# Altium PCB Optosense.PcbDoc
Units mil, origin at the board's own origin, x right, y up, seen from the top; angles counter-clockwise.
Board outline 2152.52 x 511.81 mil, 2 copper layers (Top Layer, Bottom Layer), stack 22.485 mil thick; 51 components, 30 nets, 127 pads, 19 vias.
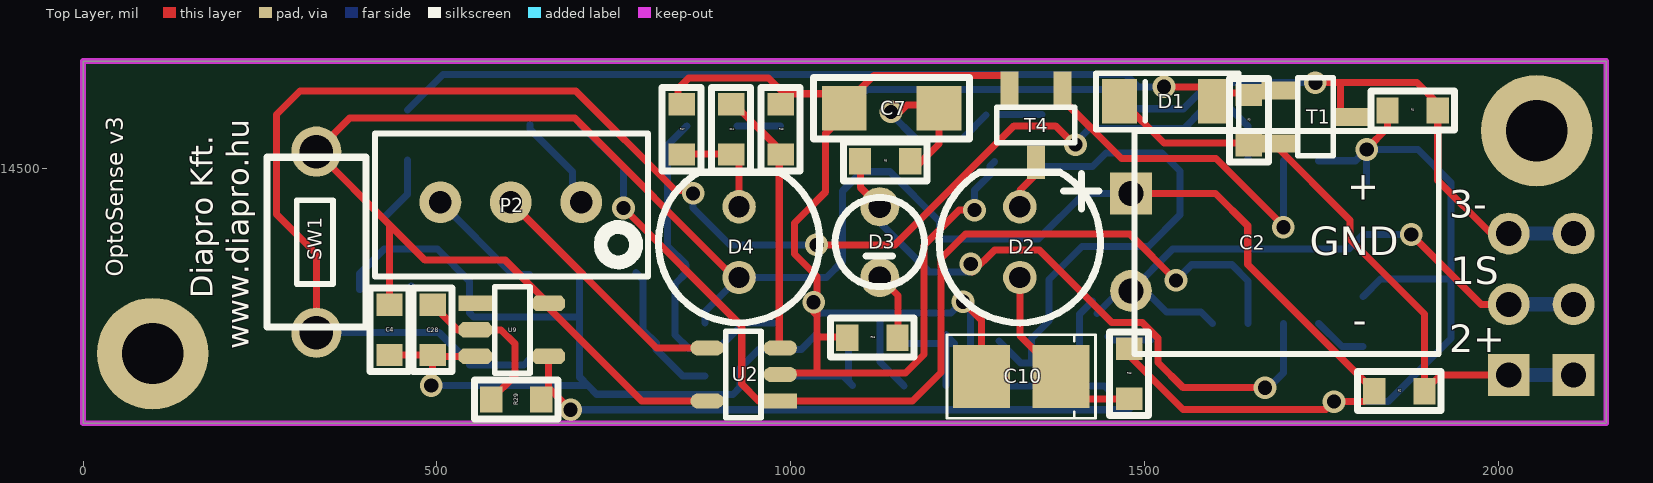
[diagram p0: Top Layer view]
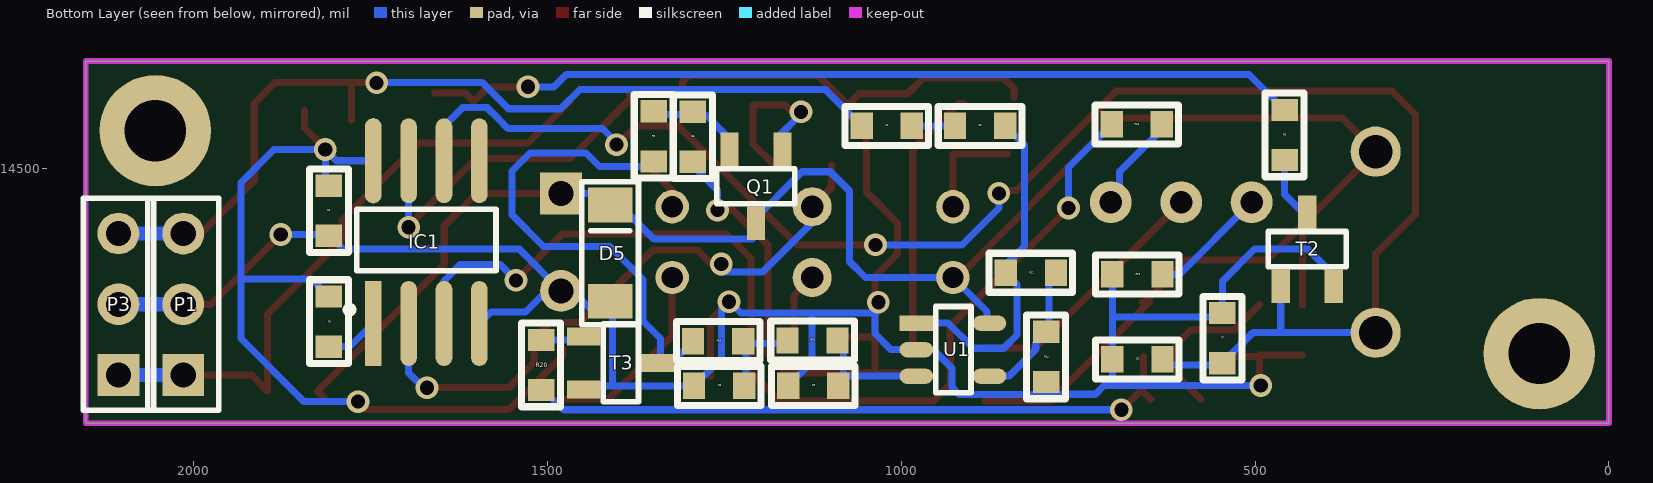
[diagram p1: Bottom Layer view, seen from below]
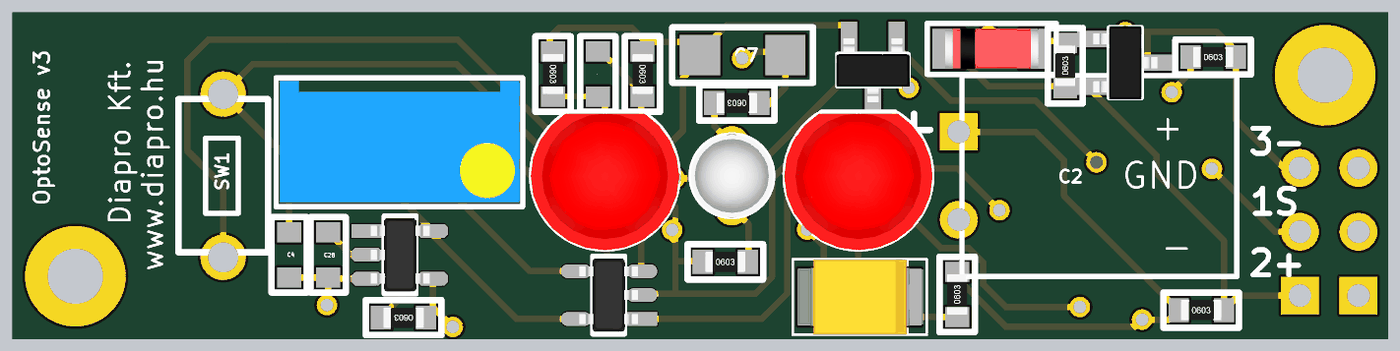
[diagram p2: 3D render of the assembled board from above, using the file's embedded part models]
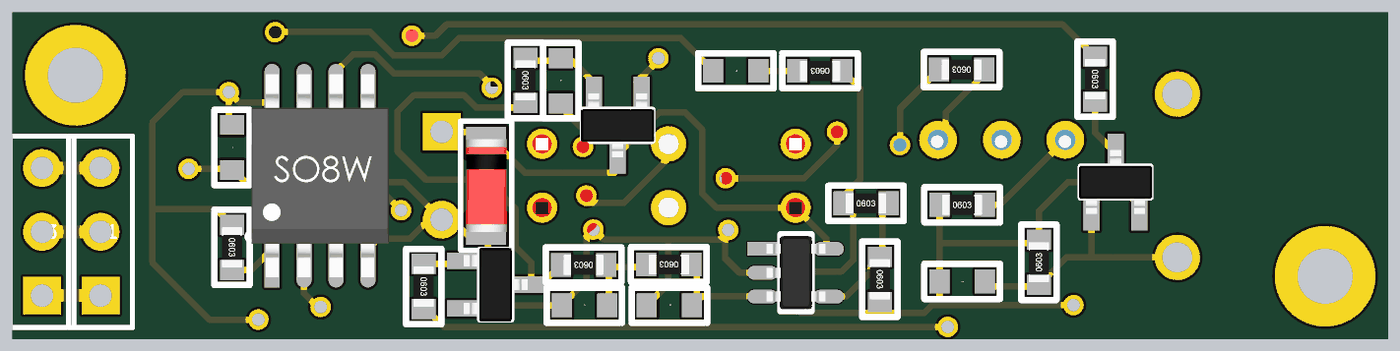
[diagram p3: 3D render of the assembled board from below, using the file's embedded part models]

## Layer stack, top to bottom
Top Layer: signal copper 1.4
Dielectric: core 19.685, FR-4, Dk 4.8
Bottom Layer: signal copper 1.4

## Board outline
0,14139.68 0,14651.5 2152.52,14651.5 2152.52,14139.68

## Design rules (kind name [scope] priority, off if disabled: settings)
Clearance [All] p1: gap=10
PolygonConnect [All] p1: connectstyle=Relief reliefconductorwidth=10 reliefentries=4 polygonreliefangle="90 Angle"
RoutingVias [All] p1: holewidth=28 width=50 viastyle="Through Hole" minholewidth=20 minwidth=32 maxholewidth=20 maxwidth=32
SilkToSilkClearance [All] p1: silktosilkclearance=0
SilkscreenOverComponentPads [All] p1: minsilkscreentomaskgap=0
SolderMaskExpansion [All] p1: expansion=4
Width [All] p1: maxlimit=10 minlimit=10 preferedwidth=10
26 further rules are at their usual default settings.

## Components (designator, comment, footprint, x,y, rotation, side; value= is the part's Value field where it differs from the comment)
C1 "150pF" FP_0603_CAP_080 1020.63,14559.96 r0 bottom
C2 "1000uF" CAP_8x11_fekvo 1480.87,14395.59 r0 top
C3 "100nF" FP_0603_CAP_080 1809.02,14439.85 r90 bottom
C4 "100nF" FP_0603_CAP_080 433.07,14271.65 r270 top
C5 "100nF" FP_0603_CAP_080 666.38,14230 r180 bottom
C6 "100nF" FP_0603_CAP_080 1294.46,14544.59 r90 bottom
C7 "22uF" FP_1206_CAP_125 1142.68,14584.71 r0 top
C8 "150pF" FP_0603_CAP_080 1257.46,14192.59 r180 bottom
C9 "150pF" FP_0603_CAP_080 1124.46,14192.59 r180 bottom
C10 "100uF" FP_3528 1325.75,14205.63 r180 top
C11 "150pF" FP_0603_CAP_080 915.87,14555 r90 top
C28 "5.6nF" FP_0603_CAP_080 493.98,14271.65 r90 top
D1 "ZENER_8.2V" SOD-80 1532.38,14594.41 r90 top
D2 "IR ado" LED_IR_5mm 1323.78,14395.59 r90 top
D3 "LED_RED" "led_3mm_standing R" 1125.87,14395.59 r90 top
D4 "IR vevo" LED_IR_5mm 927.13,14395.59 r90 top
D5 "ZENER_3.3V" SOD-80 1411.38,14380 r180 bottom
IC1 "ATtiny13" WSON_n_SOIC8 1671.22,14395.59 r90 bottom
P1 "Header 3" HDR1X3 2014.72,14207.74 r90 bottom
P2 "POTI" RES_trimmer_helipot_mini_90 604.46,14452 r270 top
P3 "Header 3" HDR1X3 2106.3,14207.76 r90 bottom
Q1 "NPN BC847A" TR_SOT23 1205.46,14474.59 r90 bottom
R1 "10K" FP_0603_RES 1809.02,14283.39 r270 bottom
R2 "1K5" FP_0603_RES 1860.2,14184.96 r0 top
R3 "100K" FP_0603_RES 1647.38,14568 r90 top
R4 "1K5" FP_0603_RES 1878.9,14581.61 r0 top
R5 "10K" FP_0603_RES 888.74,14559.96 r0 bottom
R6 "10K" FP_0603_RES 458.38,14547 r270 bottom
R7 "10K" FP_0603_RES 546.38,14260 r90 bottom
R8 "15K" FP_0603_RES 1133.46,14509.59 r180 top
R9 "10K" FP_0603_RES 1349.87,14545 r270 bottom
R10 "100K" FP_0603_RES 1258.82,14255.83 r0 bottom
R11 "100K" FP_0603_RES 1125.46,14256.59 r0 bottom
R12 "3K" FP_0603_RES 816.89,14352.28 r180 bottom
R13 "120R" FP_0603_RES 1478.31,14209.57 r90 top
R14 "2.2K" FP_0603_RES 795.24,14233.35 r270 bottom
R15 "100K" FP_0603_RES 667.28,14561.93 r0 bottom
R16 "10K" FP_0603_RES 1115.46,14260.59 r0 top
R17 "470K" FP_0603_RES 845.87,14555 r270 top
R18 "560K" FP_0603_RES 985.87,14555 r270 top
R19 "0R" FP_0603_RES 666.38,14350 r180 bottom
R20 "10K" FP_0603_RES 1509,14222 r270 bottom
R29 "10K" FP_0603_RES 612.09,14173.23 r180 top
SW1 "SW_tactile_2pin" SW_TACT_2PIN 329.69,14395.59 r90 top
T1 "BSS84" FET_SOT23 1741.46,14572.59 r180 top
T2 "MMBF170" FET_SOT23 426.38,14385.67 r270 bottom
T3 "MMBF170" FET_SOT23 1396.38,14225 r0 bottom
T4 "SI2306" FET_SOT23 1346.42,14560.96 r90 top
U1 "MCP6001" ANALOG_SOT23-5 926.46,14243.59 r180 bottom
U2 "MCP6001" ANALOG_SOT23-5 933.03,14208.58 r180 top
U9 "74AHC1G14" GATE_SOT23-5 606.6,14271.62 r0 top

## Footprints (in the part's own frame and the unit in brackets; to place one, negate y for a bottom-side part, rotate by r counter-clockwise, add the part's x,y. Pads: shape width x height; smd on the part's side, far side on the other; paste and mask are expansions set on the pad)
ANALOG_SOT23-5 [mm] "SOT23, 5-Leads, Body 2.9x1.6mm, Pitch 0.95mm, Lead Span 2.8mm, IPC Medium Density"
  rect 1.2x0.55 smd mask+0.05: 1(-1.327,0.95)
  oval 1.2x0.55 smd mask+0.05: 2(-1.327,0) 3(-1.327,-0.95) 4(1.3,-0.95) 5(1.3,0.95)
  silkscreen extent -0.64,-1.55 0.64,1.55, body extent -1.17,-1.46 1.17,1.46, height 1
CAP_8x11_fekvo [mm]
  round 1.5 hole 0.9: N(0,-1.75)
  rect 1.5x1.5 hole 0.9: P(0,1.75)
  silkscreen extent -2.41,-4.01 11.05,3.99, body extent -0.35,-4.01 11.09,3.96, height 7.99
FET_SOT23 [mm] "SOT23-3 tok"
  rect 1.2x0.65 smd: D(-1.327,0) G(1.327,-0.95) S(1.327,0.95)
  silkscreen extent -0.64,-1.4 0.64,1.4, body extent -1.27,-1.46 1.27,1.46, height 0.97
FP_0603_CAP_080 [mm] "0.8mm magas 0603 kapacitás"
  rect 0.8x0.95 smd: 1(-0.9,0) 2(0.9,0)
  silkscreen extent -1.5,-0.7 1.5,0.7, body extent -0.8,-0.4 0.76,0.4, height 0.8
FP_0603_RES [mm] "0603 ellenállás"
  rect 0.8x0.95 smd: 1(-0.9,0) 2(0.9,0)
  silkscreen extent -1.5,-0.7 1.5,0.7, body extent -0.8,-0.4 0.8,0.4, height 0.44
FP_1206_CAP_125 [mm] "1206 kapacitás 1.25 mm"
  rect 1.6x1.6 smd: 1(-1.7,0) 2(1.7,0)
  silkscreen extent -2.8,-1.1 2.8,1.1, body extent -1.52,-0.79 1.58,0.79, height 1.25
FP_3528 [mm] "3528 TANTÁL SMD \"B\"-TOK"
  rect 2.05x2.25 smd: N(1.425,0) P(-1.425,0)
  silkscreen extent -2.67,-1.5 2.67,1.5, body extent -2.52,-1.5 2.48,1.5, height 2.11
GATE_SOT23-5 [mm] "SOT23, 5-Leads, Body 2.9x1.6mm, Pitch 0.95mm, Lead Span 2.8mm, IPC Medium Density"
  rect 1.2x0.55 smd mask+0.05: 1(-1.327,0.95)
  oct 1.2x0.55 smd mask+0.05: 2(-1.327,0) 3(-1.327,-0.95) 4(1.3,-0.95) 5(1.3,0.95)
  silkscreen extent -0.64,-1.55 0.64,1.55, body extent -1.17,-1.46 1.17,1.46, height 1
HDR1X3 [mm] "Connector; Header; 3 Position"
  rect 1.5x1.5 hole 0.9: 1(0,0)
  round 1.5 hole 0.9: 2(2.54,0) 3(5.08,0)
  silkscreen extent -1.27,-1.27 6.35,1.27
"led_3mm_standing R" [mm]
  round 1.4 hole 0.8: A(1.27,0) K(-1.27,0)
  silkscreen extent -1.6,-1.6 1.6,1.6, body extent -1.66,-1.65 1.64,1.64, height 5.51
LED_IR_5mm [mm]
  round 1.2 hole 0.762: A(-1.27,0) K(1.27,0)
  silkscreen extent -2.9,-2.89 2.51,2.89, body extent -3.02,-3.02 2.67,3.02, height 9.53
RES_trimmer_helipot_mini_90 [mm]
  round 1.5 hole 0.8: 1(0,2.527) 2(0,0) 3(0,-2.527)
  silkscreen extent -2.46,-4.88 2.67,4.93, body extent -2.33,-4.74 2.5,4.79, height 11.55
SOD-80 [mm]
  rect 1.6x1.25 smd: A(0,-1.725) K(0,1.725)
  silkscreen extent -1.02,-2.57 1.02,2.57, body extent -0.79,-1.85 0.81,1.85, height 1.61
SW_TACT_2PIN [mm]
  round 1.8 hole 1.2: 1(-3.25,0) 2(3.25,0)
  silkscreen extent -3.05,-1.78 3.05,1.78, body extent -3.75,-1.78 3.75,1.78, height 4.3
TR_SOT23 [mm] "SOT23-3 tok"
  rect 1.2x0.65 smd: B(1.327,-0.95) C(-1.327,0) E(1.327,0.95)
  silkscreen extent -0.64,-1.4 0.64,1.4, body extent -1.27,-1.46 1.27,1.46, height 0.97
WSON_n_SOIC8 [mil]
  rect 120x23.62 smd: 1(-115,75)
  oval 120x23.62 smd: 2(-115,25) 3(-115,-25) 4(-115,-75) 5(115,-75) 6(115,-25) 7(115,25)
  oval 120.42x23.62 smd: 8(115,75)
  silkscreen extent -100,-98 46,113, body extent -159,-107 159,107, height 86

## Part data
C1 C3 C4 C5 C6 C8 C9 C11: library part CAP, "Capacitor"
C2 C10: library part CAP_ELECT, "Polarized Capacitor"
C7 C28: library part Cap, "Capacitor"
D1 D5: library part ZENER, "Zener Diode"
D2 D4: library part LED_B, "Typical LED"
D3: library part LED_R, "Typical LED"
P1 P3: "Header, 3-Pin"
Q1: library part NPN
R1 R2 R3 R4 R5 R6 R7 R8 R9 R10 R11 R12 R13 R14 R15 R16 R17 R18 R19: library part RES, "Resistor"
R20 R29: library part Res3, "Resistor"
T1: library part PMOS
T2 T3 T4: library part NMOS
U9: "SCHMITT-TRIGGER INVERTER"

## Free pads (board coordinates)
  round 157.48 hole 86.61: 0(98.43,14238.11) 0(2054.09,14553.07)

## Via types
v1: diameter 32, hole 20, Top Layer to Bottom Layer, 19 vias

## Nets (pads, with @x,y where several pads share a name; then routed paths per layer and width w, separated by ;. In a path a pad name is that pad's centre, name@x,y a point inside that pad or via, vN(x,y) a via of type N, cw(c..) or ccw(c..) an arc to the next point about the centre after c; other vN are vias at no path point)
2V4: C2.P C3.2 C4.1 D4.A D5.K IC1.8 Q1.C R1.1 R2.1 R4.1 R13.2 SW1.2 U1.5 U2.5 U9.5 | length 4149.3
  Top Layer w10: C4.1 433.07,14420.16 ; U9.5@649.61,14311.02 789.45,14171.18 U2.5 ; U9.5@659.78,14311.02 U9.5 596.73,14370.08 483.15,14370.08 433.07,14420.16 ; D4.A 920.12,14345.59 694.92,14570.79 376.93,14570.79 SW1.2 433.07,14420.16 ; R13.2 1478.31,14235.16 1554.58,14158.89 1756.43,14158.89 v1(1767.74,14170.2) 1810,14170.2 R2.1 1645.87,14363.86 1645.87,14418.79 1600.16,14464.49 C2.P ; v1(1813.94,14526.5) 1813.94,14527.48 1843.46,14557.01 R4.1
  Bottom Layer w10: U1.5@878.9,14281.42 878.9,14297.36 D4.A 1050.46,14345.59 1073.46,14368.59 1073.46,14468.11 1100.35,14495 1140.28,14495 1210.51,14424.76 1210.51,14400 1349.84,14400 1414.33,14464.49 C2.P ; IC1.8 1798.03,14510.59 v1(1813.94,14526.5) ; v1(1767.74,14170.2) 1767.68,14170.13 1843.9,14170.13 1933.27,14259.5 1933.27,14343.43 ; R1.1 1833.62,14343.43 1933.27,14343.43 ; C3.2@1813.94,14477.28 v1(1813.94,14526.5) ; v1(1813.94,14526.5) 1886.27,14526.5 1933.27,14479.5 1933.27,14343.43
19KHZ: R20.2 R29.1 U9.4 | length 917.5
  Top Layer w10: R29.1 657.78,14183.49 R29.1@657.78,14189.88 ; U9.4 R29.1@657.78,14189.88 ; v1(688.98,14158.68) R29.1@657.78,14189.88
  Bottom Layer w10: v1(688.98,14158.68) 1477.34,14158.68 R20.2@1491.33,14172.67
GND: C2.N C3.1 C4.2 C5.1 C6.1 C7.1 C8.1 C9.1 C10.N C28.1 D5.A IC1.4 P1.2 P3.2 R7.2 R14.2 R16.1 R17.1 R18.1 R19.1 T2.S T3.S T4.S U1.2 U2.2 U9.3 | length 4694.5
  Top Layer w10: C4.2 C28.1 ; v1(492.13,14192.91) 493.98,14194.76 C28.1 ; U9.3 495.97,14234.22 C28.1 ; R17.1@840.87,14600 840.87,14612.48 855.98,14627.59 968.75,14627.59 991.1,14605.24 1060,14605.24 1075.75,14589.49 1117.46,14631.2 1299.85,14631.2 1309.02,14622.04 T4.S T4.S@1309.02,14612.2 ; U2.2 987.24,14210.55 1037.36,14210.55 ; v1(1032.46,14310.59) 1032.46,14297.14 1037.36,14292.24 ; C7.1@1075.75,14575.71 1049.46,14549.42 1049.46,14466.74 1005.38,14422.65 1005.38,14378.81 1037.36,14346.83 1037.36,14292.24 ; R16.1@1089.53,14261.59 1038.46,14261.59 1037.36,14262.69 ; v1(1243.56,14311.27) 1269.65,14285.18 C10.N ; v1(1259.8,14440.87) 1238.15,14440.87 1188.46,14391.18 1188.46,14236.59 1162.43,14210.55 1037.36,14210.55 ; v1(1876.93,14406.42) 1975.61,14307.74 P1.2 ; 1037.36,14210.55 1037.36,14262.69 ; 1037.36,14262.69 1037.36,14292.24
  Bottom Layer w10: T2.S@390.98,14328.76 390.98,14350.98 425.67,14385.67 500.71,14385.67 546.38,14340 R7.2 551.81,14290 701.81,14290 ; v1(492.13,14192.91) 713.46,14192.91 ; R19.1 701.81,14290 ; C9.1 1126.38,14226.11 1126.38,14295.51 ; v1(1259.8,14440.87) 1259.8,14468.93 C6.1@1286.46,14495.59 ; C6.1@1281.46,14495.59 1281.46,14502.96 C6.1@1288.27,14509.76 ; D5.A@1426.38,14312.09 1408.38,14294.09 1408.38,14193.59 1407.38,14192.59 ; D5.A@1432.81,14294.93 1464.57,14326.69 C2.N ; T3.S 1443.63,14192.59 1407.38,14192.59 ; IC1.4 1579.81,14297 1531,14297 1501.31,14326.69 C2.N ; v1@1877.52,14406.42 v1(1876.93,14406.42) 1809.02,14406.42 1788.19,14385.59 1539.76,14385.59 C2.N ; 701.81,14290 C5.1 701.81,14204.57 713.46,14192.91 ; 713.46,14192.91 725.79,14180.59 766.38,14180.59 766.61,14180.36 918.47,14180.36 928.11,14190 928.11,14217.24 954.88,14244.02 1014.88,14244.02 1037.36,14266.5 1037.36,14292.24 1040.63,14295.51 1126.38,14295.51 ; 1126.38,14295.51 1226.65,14295.51 1242.41,14311.27 v1(1243.56,14311.27) 1254.13,14300.69 1254.13,14231.35 C8.1 1407.38,14192.59
  Bottom Layer w20: P1.2@2014.74,14307.76 P3.2
IR: IC1.7 T4.G | length 503.8
  Top Layer w10: T4.G@1383.82,14612.2 1383.82,14597.56 1467.68,14513.7 1601.11,14513.7 v1@1696.22,14418.59
  Bottom Layer w10: v1@1696.22,14407.99 IC1.7
  other v1: 1696.22,14416.59
LED: D3.A IC1.2 R8.2 | length 908.8
  Top Layer w10: R8.2@1098.39,14504.84 1098.39,14473.07 D3.A ; v1(1254.46,14364.59) 1254.46,14355.65 1256.85,14353.27 1287.8,14384.21 1351.65,14384.21 1453.7,14282.17 1496.8,14282.17 1519.21,14259.75 1519.21,14225.37 1554.7,14189.89 v1(1670.3,14189.89)
  Bottom Layer w10: D3.A 1125.87,14423.23 1195.83,14353.27 1256.85,14353.27 1254.46,14355.65 v1(1254.46,14364.59) ; v1(1670.3,14189.89) 1675.16,14189.89 1696.22,14210.94 IC1.2
LINE_A: D1.K P1.1 P3.1 R2.2 R3.1 T1.S | length 896.8
  Top Layer w10: D1.K@1468.46,14594.41 1527.28,14535.59 1681.46,14535.59 1790.46,14426.59 1790.46,14399.38 1895.63,14294.21 R2.2 1918.41,14207.74 P1.1
  Bottom Layer w20: P1.1@2014.74,14207.76 P3.1
LINE_B: C1.2 P1.3 P3.3 R4.2 T1.D | length 1313.3
  Top Layer w10: v1@1736.88,14621.01 v1@1741.88,14621.01 ; v1(1741.46,14620.59) v1@1741.88,14621.01 ; T1.D@1776.71,14567.59 1776.71,14618.35 1774.05,14621.01 ; P1.3 1989.52,14407.74 1914.33,14482.93 R4.2 1914.33,14591.54 1884.86,14621.01 1774.05,14621.01 ; v1@1741.88,14621.01 1774.05,14621.01
  Bottom Layer w10: C1.2 1107.48,14611.38 1454.2,14611.38 1481.5,14584.08 1555.32,14584.08 1592.25,14621.01 1743.14,14621.01 v1@1743.14,14622.89
  Bottom Layer w20: P1.3 P3.3@2106.28,14407.74
MUTE: C5.2 IC1.6 R7.1 SW1.1 T2.G | length 2405.4
  Top Layer w10: SW1.1 329.69,14378.86 273.58,14434.96 273.58,14576 306.76,14609.17 696.34,14609.17 837.09,14468.43 862.17,14468.43 v1(862.17,14464.49) ; v1(1036.38,14391.65) 1147,14391.65 1315.35,14560 1374.4,14560 1396.85,14537.55 1404.27,14537.55 1410.77,14531.05 1410.77,14530.77 v1@1409.45,14529.45
  Bottom Layer w10: SW1.1@310.98,14248.94 SW1.1 465.78,14267.64 ; T2.G 463.78,14269.64 465.78,14267.64 ; R7.1@546.38,14222 622.94,14222 C5.2 ; R7.1 503.31,14267.64 465.78,14267.64 ; v1(862.17,14464.49) 862.17,14443.7 914.21,14391.65 v1(1036.38,14391.65) ; v1@1406.14,14539.96 1422.2,14556.02 1556.06,14556.02 1569.41,14569.37 1569.41,14569.89 1585.12,14585.59 1620,14585.59 1646.22,14559.37 IC1.6
  other v1: 1402.45,14533.45
NetC1_1: C1.1 R5.2 | length 61
  Bottom Layer w10: R5.2 C1.1
NetC6_2: C6.2 Q1.E R9.1 | length 105.5
  Bottom Layer w10: Q1.E@1245.87,14545 C6.2@1275.87,14575 ; C6.2@1292.4,14575 1293.11,14575.71 R9.1@1355.2,14575.71
NetC7_2: C7.2 Q1.B R8.1 | length 241.4
  Top Layer w10: v1@1137.8,14576.69 1141.69,14576.69 1146.61,14571.77 1164.33,14589.49 1209.61,14589.49 1209.61,14534.37 1180.08,14504.84 R8.1@1169.25,14504.84
  Bottom Layer w10: v1@1137.8,14576.69 1141.69,14576.69 Q1.B@1176.06,14542.32
  other v1: 1141.8,14579.69
NetC8_2: C8.2 R10.1 R11.2 | length 161.3
  Bottom Layer w10: R11.2 1164.9,14252.59 1231.54,14252.59 1219.45,14264.68 C8.2@1219.45,14192.83
NetC9_2: C9.2 R11.1 U1.3 | length 180.8
  Bottom Layer w10: U1.3@982.32,14206.61 1073.78,14206.61 1087.56,14192.83 1081.46,14198.93 1081.46,14248.02 R11.1
NetC10_P: C10.P D2.A R13.1 | length 273.5
  Top Layer w10: D2.A 1323.78,14263.7 C10.P 1413.35,14174.13 R13.1
NetC11_1: C11.1 D4.K R17.2 | length 151.6
  Top Layer w10: R17.2@849.96,14520 927.13,14520 D4.K
NetC11_2: C11.2 R18.2 U2.3 | length 380.8
  Top Layer w10: C11.2@911.38,14591.46 919.41,14591.46 983.8,14527.07 983.8,14247.46 U2.3
NetC28_2: C28.2 R29.2 U9.2 | length 231.7
  Top Layer w10: C28.2 529.44,14271.62 U9.2 590.58,14271.62 610.24,14251.97 610.24,14206.81 R29.2
NetD1_A: D1.A R3.2 R6.1 T1.G | length 1242.6
  Top Layer w10: v1(1527.52,14615.08) 1583.62,14615.08 1604.29,14594.41 1616.47,14606.59 R3.2@1659.46,14606.59
  Bottom Layer w10: R6.1 508.44,14632.5 1473.37,14632.5 1490.79,14615.08 v1(1527.52,14615.08)
NetD2_K: D2.K T4.D | length 63.5
  Top Layer w10: D2.K 1323.78,14468.59 1348.39,14493.2 T4.D@1348.39,14498.94
NetD3_K: D3.K R16.2 | length 87.6
  Top Layer w10: D3.K 1151.46,14319.99 R16.2@1151.46,14268.59
NetIC1_1: IC1.1 R1.2 | length 76.3
  Bottom Layer w10: IC1.1 1778.86,14247.95 R1.2
NetP2_1: P2.1 R15.1 | length 139.8
  Bottom Layer w10: R15.1 631.85,14555.13 691.89,14495.09 691.89,14464.07 P2.1
NetP2_2: P2.2 U2.4 | length 362.7
  Top Layer w10: P2.2 810.48,14245.98 U2.4
NetP2_3: P2.3 R19.2 | length 168.2
  Bottom Layer w10: P2.3 606.96,14350 R19.2
NetR6_2: R6.2 T2.D | length 90.7
  Bottom Layer w10: T2.D@428.38,14433.24 458.38,14463.24 R6.2
NetR9_2: R9.2 R10.2 T3.D | length 698.8
  Bottom Layer w10: R10.2 1325.08,14225 T3.D 1340.38,14228.76 1340.38,14259.5 1364.88,14284 1364.88,14342.91 1411.59,14389.61 1505.48,14389.61 1550.16,14434.29 1550.16,14495.98 1524.57,14521.57 1445.41,14521.57 1426.29,14502.45 1356.98,14502.45 R9.2
NetR12_2: R12.2 R14.1 U1.4 | length 204.5
  Bottom Layer w10: R12.2 791.46,14342.28 791.46,14271.59 810,14253.06 810,14244.06 847.44,14206.61 U1.4@878.9,14206.61
NetR20_1: R20.1 T3.G | length 62.4
  Bottom Layer w10: T3.G 1453.59,14257.43 R20.1
SENSE: IC1.3 R15.2 U2.1 | length 1496.4
  Top Layer w10: v1(763.74,14443.82) 930.87,14276.69 930.87,14195 954.69,14171.18 U2.1 1172.2,14171.18 1212.56,14211.54 1212.56,14372.4 1247.13,14406.97 1479.09,14406.97 v1(1544.46,14341.59) v1@1544.46,14335.59
  Bottom Layer w10: R15.2 763.74,14500.91 v1(763.74,14443.82) ; v1@1544.46,14335.59 v1(1544.46,14341.59) 1566.46,14363.59 1623.5,14363.59 1646.22,14340.87 IC1.3
SINE: R5.1 R12.1 U1.1 | length 492.9
  Bottom Layer w10: R5.1 825.87,14532.52 825.87,14390 852.32,14363.54 R12.1 836.46,14336.43 836.46,14264.4 855.28,14245.59 898.19,14245.59 934.02,14281.42 U1.1@982.32,14281.42
pads on no net: IC1.5 U9.1

## Keep-outs
Keep-Out Layer:
  lines w8: 0,14139.68 195.83,14139.68 1955.67,14139.68 2152.52,14139.68 2152.52,14651.5 1955.67,14651.5 195.83,14651.5 0,14651.5 0,14139.68

## Silkscreen, mask and mechanical layers (free items; w line width, h text height)
Top Overlay:
  text "+" at 1792.46,14496 h40 r270
  text "3-" at 1930.43,14430.28 h39.37
  text "GND" at 1733.46,14377 h40
  text "OptoSense v3" at 57,14347 h23.62 r90
  text "1S" at 1932.43,14336.28 h39.37
  text "Diapro Kft." at 183,14316 h31.5 r90
  text "-" at 1794.46,14266 h40
  text "www.diapro.hu" at 234,14244 h31.5 r90
  text "2+" at 1930.43,14239.91 h39.37